# EAGLE board dehydration (EAGLE 7.7.0)
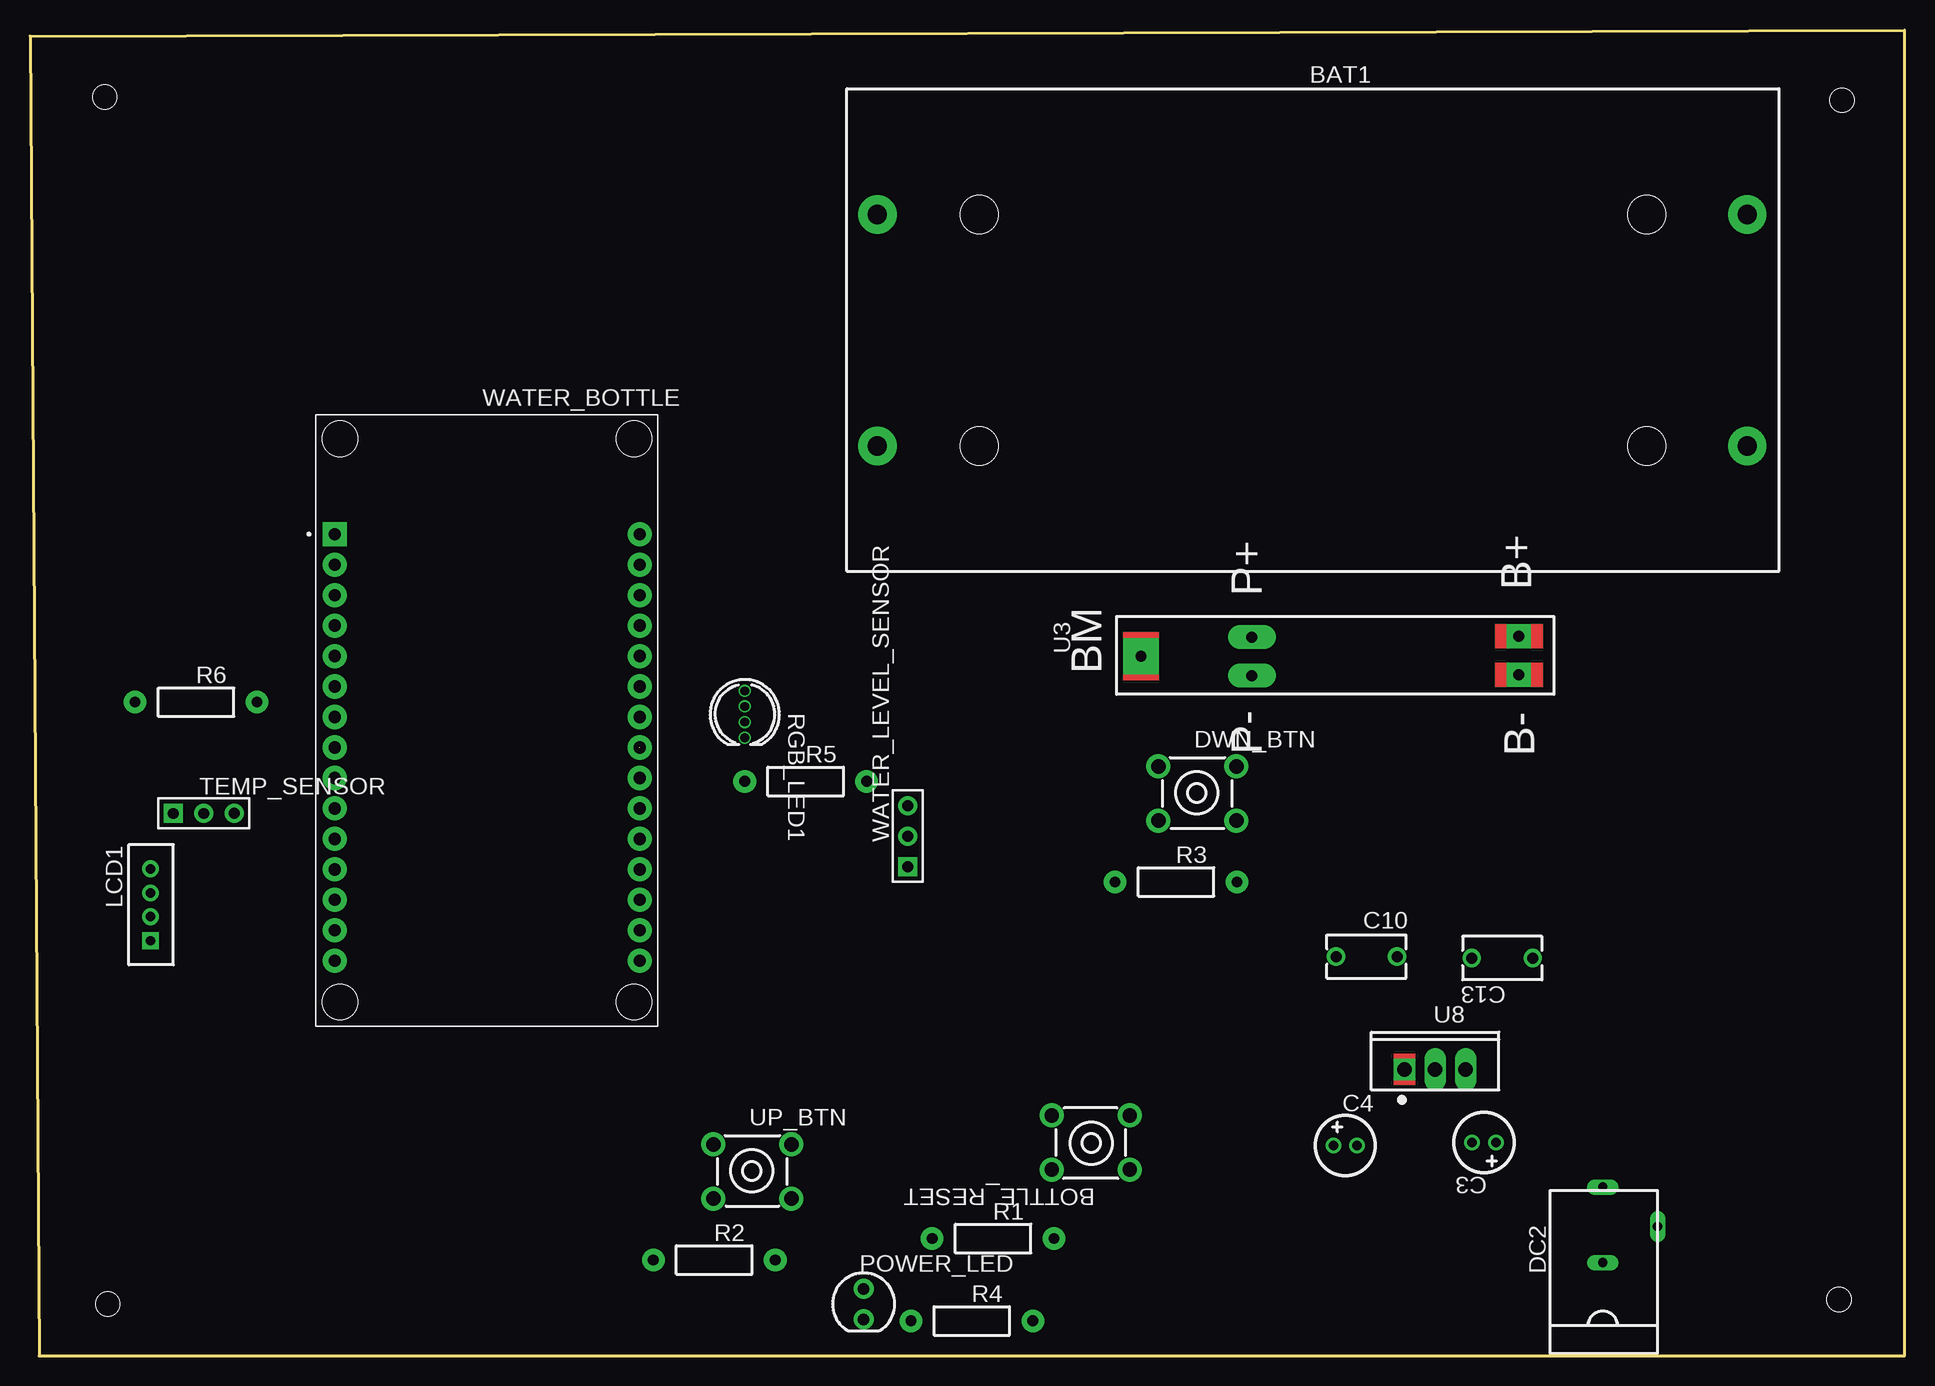
[diagram p0: board, top side]
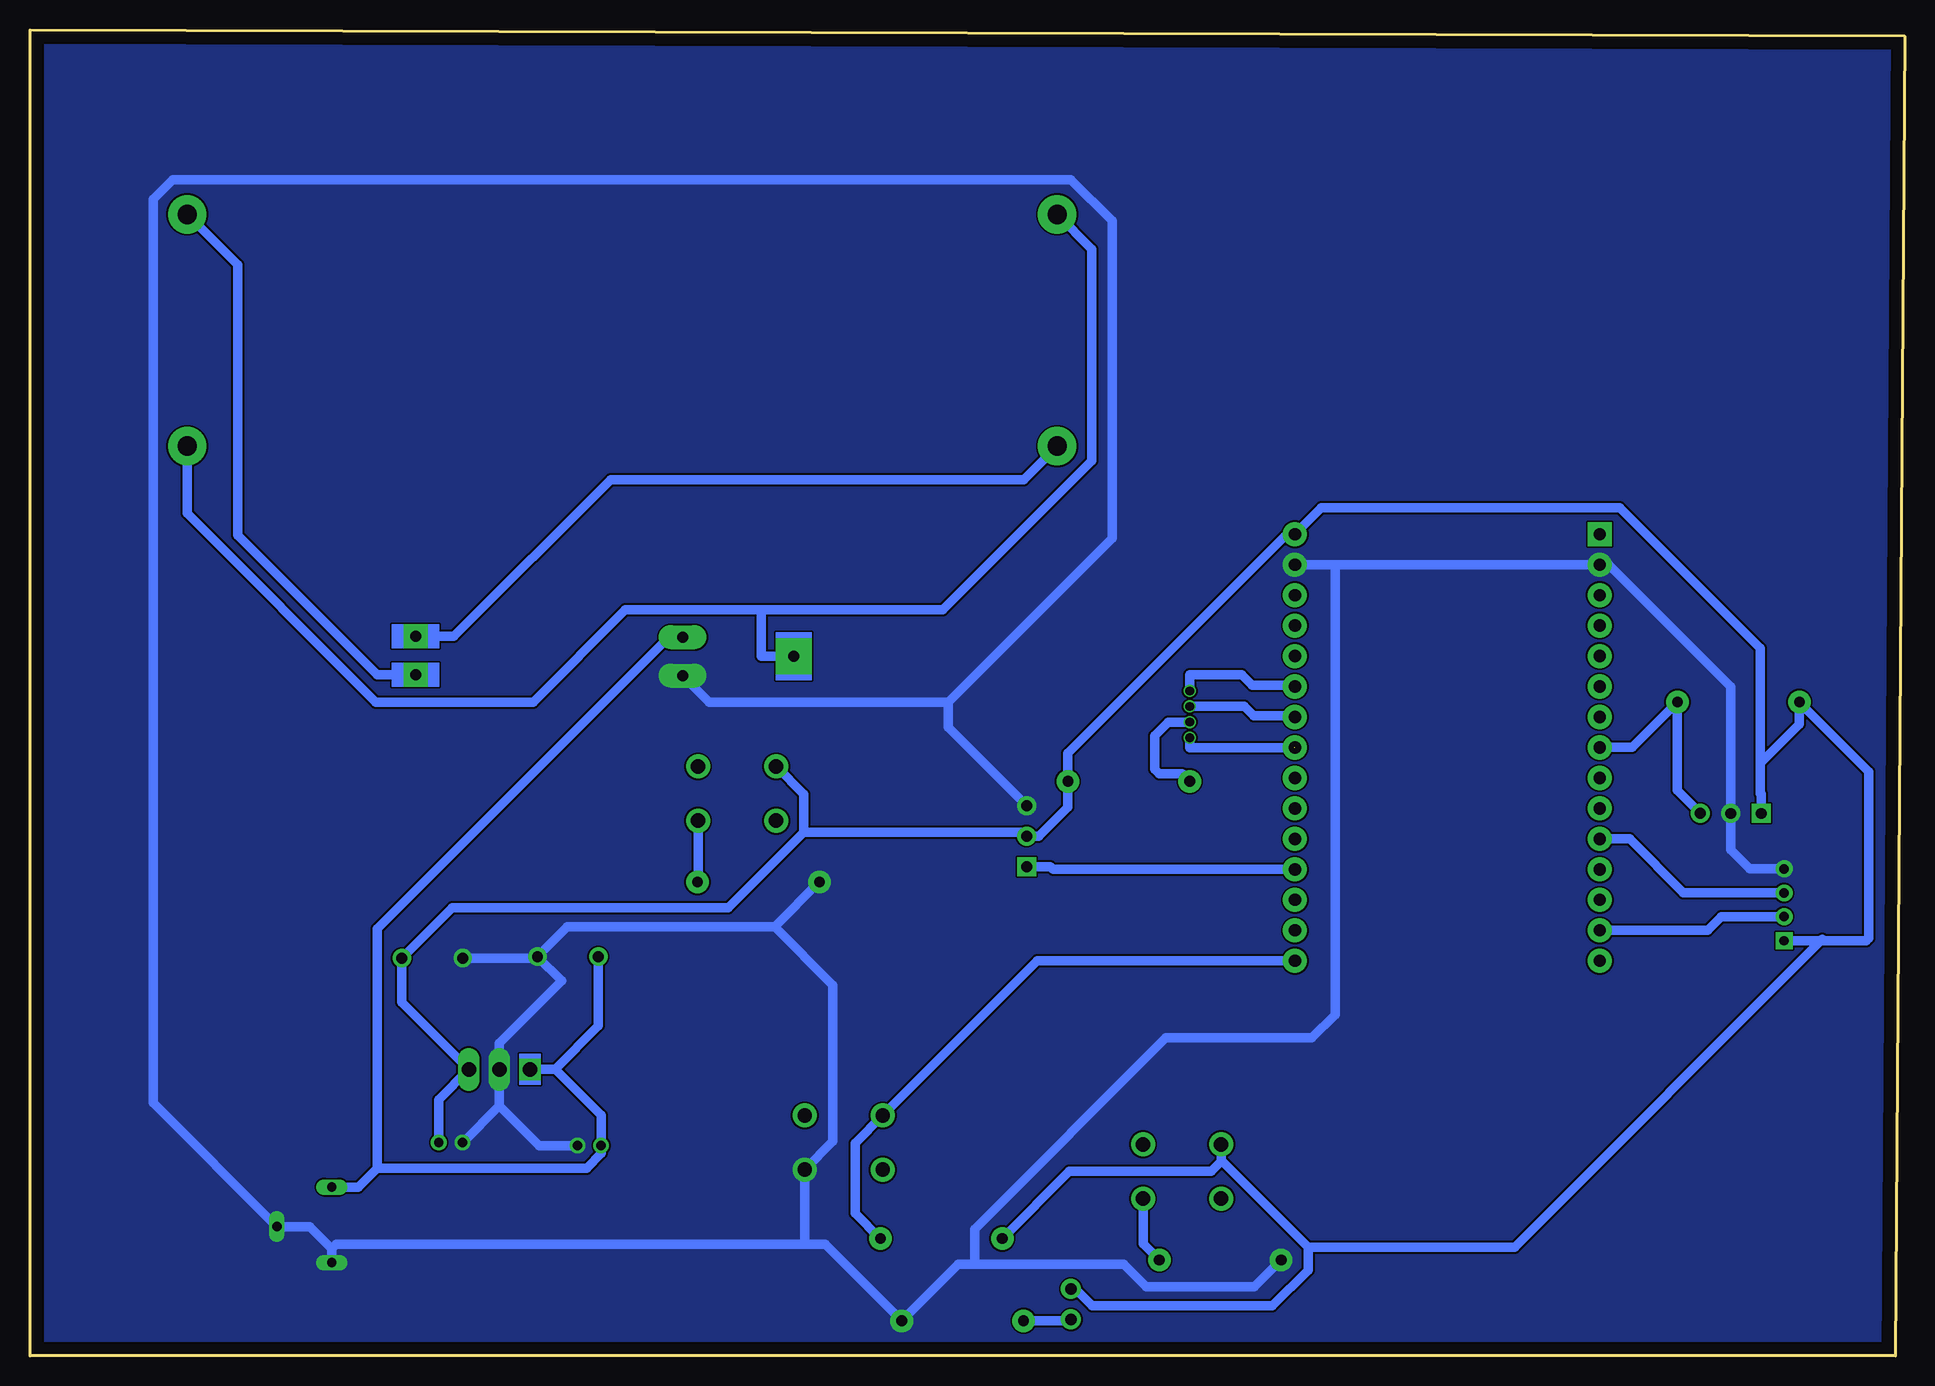
[diagram p1: board, bottom side, seen from below]

Size 156.21 x 110.49 mm. Coordinates in mm from the lower left corner, seen from the top.
Outline: 0,109.98 0.76,0 156.21,0 156.21,110.49 0,109.98
Copper layers (1*16): Top 0.035mm / dielectric 1.5mm / Bottom 0.035mm
Design rules "PCB_main_Dehydration_2_2023-07-20_1": minimum track width 6mil, minimum drill 0.35mm, track to track 6mil, track to pad 6mil, pad to pad 6mil, via to via 6mil, smd to smd 6mil, copper to edge 40mil, drill to drill 6mil, minimum pad ring 0mil, minimum via ring 0mil, stop-mask expansion 4mil, vias tented up to drill 0mil, thermal gap 10mil

## Footprints (pad centres in the part's own frame; a part is rotated, then mirrored left to right if it is on the bottom)
18650_X_2_HOLDER_1PRIMARY = drill 1.6 pad 3.2: 1 72.492,0; 2 0,0; 3 72.492,19.304; 4 0,19.304
KEY-TH_4P-L6.0-W6.0-P4.50_1PRIMARY = drill 1.194 pad 2.007: 1 -3.251,-2.261; 2 3.251,-2.261; 3 3.251,2.261; 4 -3.251,2.261
C3_1PRIMARY = drill 0.787 pad 1.295: 1 -0.991,0; 2 0.991,0
C4_1PRIMARY = drill 0.787 pad 1.295: 1 -0.991,0; 2 0.991,0
CAP-TH_L6.5-W3.5-P5.00-D1.0_1PRIMARY = drill 0.914 pad 1.524: 1 -2.54,0; 2 2.54,0
DC-5020_1PRIMARY = drill 0.787 pad 1.295 long: 1 3.15,2.286; 2 -3.15,2.286; 3 -0.152,-2.286
CONN-TH_4P-P2.00_JST_04DA-8M_1PRIMARY = drill 0.787 pad 1.397 square: 1 -2.997,0 | drill 0.787 pad 1.397: 2 -0.991,0; 3 0.991,0; 4 2.997,0
LED-TH_BD5.0_BLUE_1PRIMARY = drill 0.965 pad 1.651: 1 0,1.27; 2 0,-1.27
R_AXIAL-0.4_1PRIMARY = drill 0.889 pad 1.88: 1 -5.08,0; 2 5.08,0
LED-TH_4P-BD5.8-P1.30_1PRIMARY = drill 0.711 pad 0.991: 1 1.956,0; 2 0.66,0; 3 -0.66,0; 4 -1.956,0
HDR-F-2.54_1X3_1PRIMARY = drill 0.889 pad 1.575 square: 1 -2.54,0 | drill 0.889 pad 1.575: 2 0,0 | drill 0.914 pad 1.575: 3 2.54,0
BMS_2S_COPY_1PRIMARY = drill 0.914 pad 2.007 square: 1 1.676,-31.496; 3 -1.524,-31.496 | drill 0.914 pad 2.997 square: 2 0,0 | drill 0.914 pad 2.007 long: 4 1.6,-9.246; 5 -1.6,-9.246
TO-220-3_L10.0-W4.5-P2.54-L_1PRIMARY = drill 1.194 pad 1.803 square: 1 -2.54,0 | drill 1.194 pad 1.803 long: 2 0,0; 3 2.54,0
MODULE_ESP32_DEVKIT_V1_1PRIMARY = drill 1.016 pad 2.007 square: 1 -12.7,15.519 | drill 1.016 pad 2.007: 2 -12.7,12.979; 3 -12.7,10.439; 4 -12.7,7.899; 5 -12.7,5.359; 6 -12.7,2.819; 7 -12.7,0.279; 8 -12.7,-2.261; 9 -12.7,-4.801; 10 -12.7,-7.341; 11 -12.7,-9.881; 12 -12.7,-12.421; 13 -12.7,-14.961; 14 -12.7,-17.501; 15 -12.7,-20.041; 16 12.7,-20.041; 17 12.7,-17.501; 18 12.7,-14.961; 19 12.7,-12.421; 20 12.7,-9.881; 21 12.7,-7.341; 22 12.7,-4.801; 23 12.7,-2.261; 24 12.7,0.279; 25 12.7,2.819; 26 12.7,5.359; 27 12.7,7.899; 28 12.7,10.439; 29 12.7,12.979; 30 12.7,15.519

## Placement (x,y rotation side)
BAT1  BATTERY18650_X2  [18650_X_2_HOLDER_1PRIMARY]  70.61,75.82 0 top
BOTTLE_RESET  button6*6*8.5  [KEY-TH_4P-L6.0-W6.0-P4.50_1PRIMARY]  88.39,17.78 180 top
C3  10u  [C3_1PRIMARY]  121.16,17.78 180 top
C4  1000u  [C4_1PRIMARY]  109.6,17.53 0 top
C10  0.1u  [CAP-TH_L6.5-W3.5-P5.00-D1.0_1PRIMARY]  111.38,33.27 0 top
C13  0.1u  [CAP-TH_L6.5-W3.5-P5.00-D1.0_1PRIMARY]  122.68,33.15 180 top
DC2  DC005-2.0MM  [DC-5020_1PRIMARY]  133.35,10.92 90 top
DWN_BTN  button6*6*8.5  [KEY-TH_4P-L6.0-W6.0-P4.50_1PRIMARY]  97.28,46.86 0 top
LCD1  04DA-8M_LF__SN_  [CONN-TH_4P-P2.00_JST_04DA-8M_1PRIMARY]  10.03,37.59 90 top
POWER_LED  LED-TH-5mm_B  [LED-TH_BD5.0_BLUE_1PRIMARY]  69.47,4.32 0 top
R1  10k  [R_AXIAL-0.4_1PRIMARY]  80.26,9.78 0 top
R2  10k  [R_AXIAL-0.4_1PRIMARY]  57.02,8 0 top
R3  10k  [R_AXIAL-0.4_1PRIMARY]  95.5,39.5 0 top
R4  220  [R_AXIAL-0.4_1PRIMARY]  78.49,2.92 0 top
R5  220  [R_AXIAL-0.4_1PRIMARY]  64.64,47.88 0 top
R6  5K  [R_AXIAL-0.4_1PRIMARY]  13.84,54.48 0 top
RGB_LED1  f5_RGB_Transparent  [LED-TH_4P-BD5.8-P1.30_1PRIMARY]  59.56,53.47 270 top
TEMP_SENSOR  HDR-F-2.54_1x3  [HDR-F-2.54_1X3_1PRIMARY]  14.48,45.21 0 top
U3  bms_2s  [BMS_2S_COPY_1PRIMARY]  92.58,58.29 90 top
U8  LM7805L-TA3-T  [TO-220-3_L10.0-W4.5-P2.54-L_1PRIMARY]  117.09,23.88 0 top
UP_BTN  button6*6*8.5  [KEY-TH_4P-L6.0-W6.0-P4.50_1PRIMARY]  60.2,15.37 0 top
WATER_BOTTLE  ESP32-DEVKIT-V1  [MODULE_ESP32_DEVKIT_V1_1PRIMARY]  38.1,52.96 0 top
WATER_LEVEL_SENSOR  HDR-F-2.54_1x3  [HDR-F-2.54_1X3_1PRIMARY]  73.15,43.31 90 top

## Library data of the parts
BAT1 BOTTLE_RESET C3 C4 C10 C13 DC2 DWN_BTN LCD1 POWER_LED R1-R6 RGB_LED1 TEMP_SENSOR U3 U8 UP_BTN WATER_BOTTLE WATER_LEVEL_SENSOR = PCB_main_Dehydration_2_2023-07-20_1

## Nets
5V: C3.1 C13.1 DWN_BTN.4 LCD1.1 POWER_LED.1 R1.1 R5.2 R6.1 TEMP_SENSOR.1 U8.3 UP_BTN.4 WATER_BOTTLE.30 WATER_LEVEL_SENSOR.2
12V: C4.1 C10.1 DC2.1 U3.4 U8.1
BOTTLE_RESET_1: BOTTLE_RESET.1
BOTTLE_RESET_3: BOTTLE_RESET.3
DWN_BTN: DWN_BTN.2 R3.2
DWN_BTN_1: DWN_BTN.1
DWN_BTN_3: DWN_BTN.3
GND: BOTTLE_RESET.4 C3.2 C4.2 C10.2 C13.2 DC2.2 DC2.3 LCD1.4 R2.1 R3.1 R4.2 TEMP_SENSOR.2 U3.5 U8.2 WATER_BOTTLE.2 WATER_BOTTLE.29 WATER_LEVEL_SENSOR.3
MANAGER: BAT1.1 BAT1.4 U3.2
OUTPUT_LED1: RGB_LED1.1 WATER_BOTTLE.23
OUTPUT_LED2: RGB_LED1.3 WATER_BOTTLE.24
OUTPUT_LED3: RGB_LED1.4 WATER_BOTTLE.25
R4_1: POWER_LED.2 R4.1
RESET: BOTTLE_RESET.2 R1.2 WATER_BOTTLE.16
RGB_LED1_2: R5.1 RGB_LED1.2
S: WATER_BOTTLE.19 WATER_LEVEL_SENSOR.1
SCL: LCD1.2 WATER_BOTTLE.14
SDA: LCD1.3 WATER_BOTTLE.11
TEMP_SENS: R6.2 TEMP_SENSOR.3 WATER_BOTTLE.8
U3_1: BAT1.2 U3.1
U3_3: BAT1.3 U3.3
UP_BTN: R2.2 UP_BTN.2
UP_BTN_1: UP_BTN.1
UP_BTN_3: UP_BTN.3
WATER_BOTTLE_1: WATER_BOTTLE.1
WATER_BOTTLE_3: WATER_BOTTLE.3
WATER_BOTTLE_4: WATER_BOTTLE.4
WATER_BOTTLE_5: WATER_BOTTLE.5
WATER_BOTTLE_6: WATER_BOTTLE.6
WATER_BOTTLE_7: WATER_BOTTLE.7
WATER_BOTTLE_9: WATER_BOTTLE.9
WATER_BOTTLE_10: WATER_BOTTLE.10
WATER_BOTTLE_12: WATER_BOTTLE.12
WATER_BOTTLE_13: WATER_BOTTLE.13
WATER_BOTTLE_15: WATER_BOTTLE.15
WATER_BOTTLE_17: WATER_BOTTLE.17
WATER_BOTTLE_18: WATER_BOTTLE.18
WATER_BOTTLE_20: WATER_BOTTLE.20
WATER_BOTTLE_21: WATER_BOTTLE.21
WATER_BOTTLE_22: WATER_BOTTLE.22
WATER_BOTTLE_26: WATER_BOTTLE.26
WATER_BOTTLE_27: WATER_BOTTLE.27
WATER_BOTTLE_28: WATER_BOTTLE.28

## Tracks (layer width: path | path; a pad name or v marks a point on that pad's centre or on a via)
5V
  Bottom 0.8: 6.98,34.59 3.18,34.59 2.97,34.8 2.97,48.69 R6.1 8.76,52.65 12.01,49.4 | 49.71,9.07 56.87,16.2 56.95,16.2 | POWER_LED.1 69.11,5.59 67.69,4.17 52.71,4.17 49.71,7.14 49.71,9.07 | 49.71,9.07 32.49,9.07 6.86,34.72 6.98,34.59 | 6.98,34.59 LCD1.1 | 12.01,49.4 12.01,58.98 23.72,70.69 48.59,70.69 WATER_BOTTLE.30 51.46,68.48 69.72,50.22 R5.2 69.72,45.72 72.14,43.31 WATER_LEVEL_SENSOR.2 73.48,43.64 91.75,43.64 | 91.75,43.64 91.75,46.81 DWN_BTN.4 | 91.75,43.64 98.02,37.36 121.01,37.36 C13.1 125.22,29.46 U8.3 122.15,21.34 C3.1 | 56.95,16.2 57.78,15.37 69.6,15.37 R1.1 | 56.95,16.2 UP_BTN.4 | 12.01,49.4 12.01,46.86 11.94,46.86 TEMP_SENSOR.1
12V
  Bottom 0.8: 127.28,15.65 127.28,35.58 102.97,59.89 U3.4 | DC2.1 128.85,14.07 127.28,15.65 | 127.28,15.65 109.83,15.65 108.61,16.89 C4.1 108.61,20.04 112.45,23.88 | C10.1 108.84,27.51 112.45,23.88 | 112.45,23.88 U8.1
DWN_BTN
  Bottom 0.8: R3.2 100.53,39.55 DWN_BTN.2
GND
  Bottom 0.8: LCD1.4 12.88,40.59 14.48,42.19 TEMP_SENSOR.2 14.48,55.75 24.66,65.94 WATER_BOTTLE.2 47.45,65.94 | 79.71,54.46 66.04,68.12 66.04,94.59 69.47,98.02 144.32,98.02 145.95,96.39 145.95,21.11 DC2.3 132.92,10.77 131.06,8.94 | WATER_LEVEL_SENSOR.3 79.71,52.4 79.71,54.46 | U3.5 99.59,54.46 79.71,54.46 | 47.45,65.94 WATER_BOTTLE.29 | 77.5,7.62 77.5,10.54 61.54,26.49 49.38,26.49 47.45,28.42 47.45,65.94 | 77.5,7.62 78.87,7.62 R4.2 89.94,9.3 91.64,9.3 | R2.1 54.18,5.77 63.19,5.77 65.05,7.62 77.5,7.62 | R3.1 94.16,35.76 | 94.16,35.76 111.43,35.76 C10.2 | 94.16,35.76 89.31,30.89 89.31,17.88 BOTTLE_RESET.4 91.64,9.3 | 91.64,9.3 130.71,9.3 131.06,8.94 | DC2.2 131.06,8.94 | 117.09,20.85 C3.2 | 117.09,20.85 U8.2 117.09,26.06 111.91,31.27 C10.2 | C4.2 113.77,17.53 117.09,20.85 | C13.2 114.05,33.15 C10.2
  pour Bottom (no thermals): -9.14,113.92 -9.14,0.63 -3.17,-5.33 162.81,-5.33 164.34,-3.81 164.34,112.65 160.53,116.46
MANAGER
  Bottom 0.8: 95.28,62.18 80.16,62.18 67.74,74.6 67.74,92.23 BAT1.4 | 95.28,62.18 106.6,62.18 114.28,54.48 127.38,54.48 143.1,70.23 BAT1.1 | 95.28,62.18 95.28,58.29 U3.2
OUTPUT_LED1  (1 unrouted)
  Bottom 0.8: RGB_LED1.1 59.56,50.67 50.8,50.67
OUTPUT_LED2
  Bottom 0.8: RGB_LED1.3 55.02,54.13 54.23,53.34 50.9,53.34 WATER_BOTTLE.24
OUTPUT_LED3
  Bottom 0.8: RGB_LED1.4 59.56,56.77 55.25,56.77 54.36,55.88 50.9,55.88 WATER_BOTTLE.25
R4_1
  Bottom 0.8: R4.1 69.6,2.92 POWER_LED.2
RESET
  Bottom 0.8: WATER_BOTTLE.16 72.26,32.92 BOTTLE_RESET.2 87.45,17.73 87.45,11.89 R1.2
RGB_LED1_2
  Bottom 0.8: RGB_LED1.2 61.37,52.81 62.48,51.69 62.48,48.89 62.1,48.51 60.2,48.51 R5.1
S
  Bottom 0.8: WATER_LEVEL_SENSOR.1 71.17,40.77 70.94,40.54 WATER_BOTTLE.19
SCL
  Bottom 0.8: WATER_BOTTLE.14 16.38,35.46 15.27,36.6 LCD1.2
SDA
  Bottom 0.8: WATER_BOTTLE.11 22.91,43.08 18.44,38.58 LCD1.3
TEMP_SENS
  Bottom 0.8: TEMP_SENSOR.3 18.92,47.12 R6.2 22.71,50.7 WATER_BOTTLE.8
U3_1
  Bottom 0.8: U3.1 120.88,59.97 107.82,73.02 73.41,73.02 BAT1.2
U3_3
  Bottom 0.8: U3.3 127.28,56.77 138.91,68.4 138.91,90.93 BAT1.3
UP_BTN
  Bottom 0.8: R2.2 63.45,9.35 UP_BTN.2